# Altium PCB Lab1_PCB.PcbDoc
Units mm, origin at the board's own origin, x right, y up, seen from the top; angles counter-clockwise.
Board outline 45.47 x 24.64 mm, 2 copper layers (Top Layer, Bottom Layer); 16 components, 15 nets, 57 pads, 16 vias.
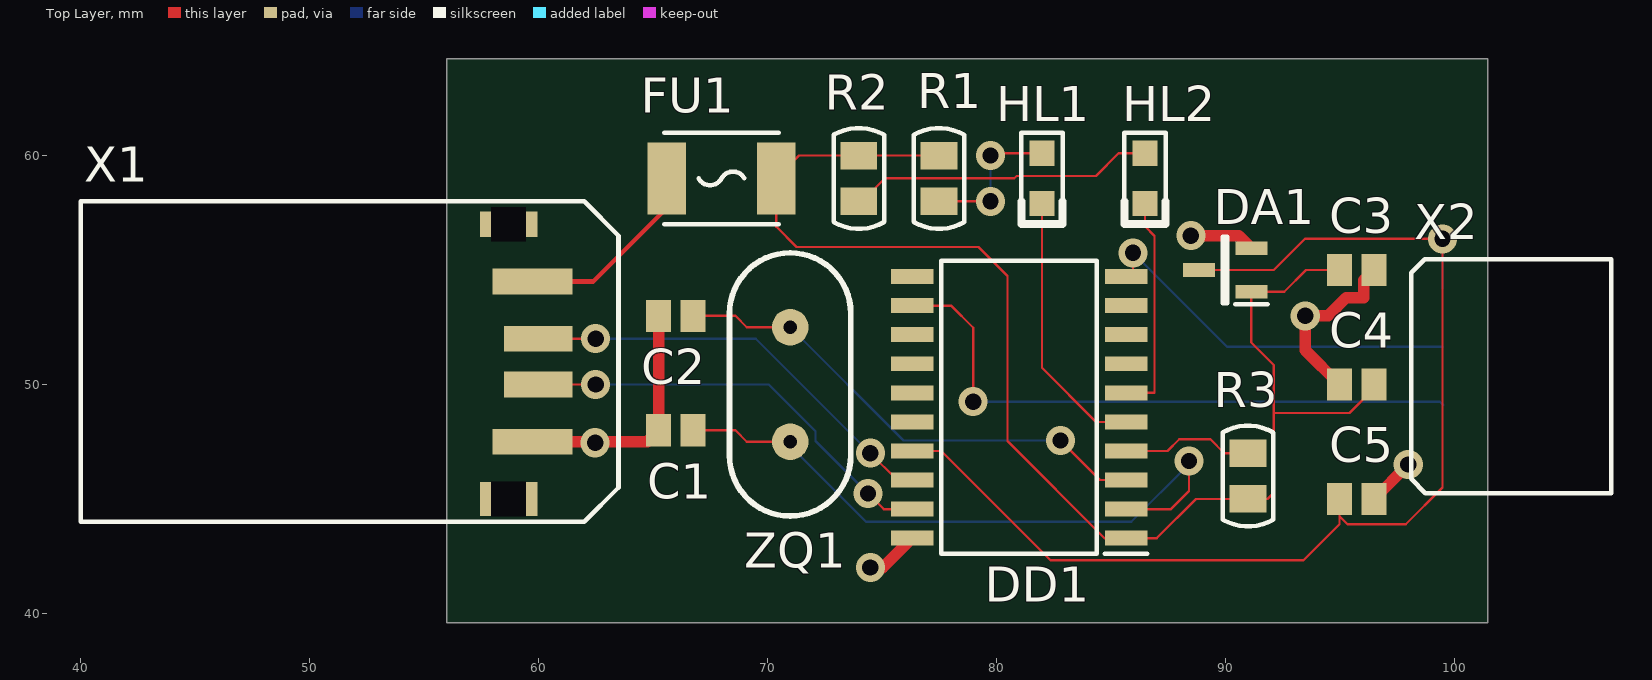
[diagram p0: Top Layer view]
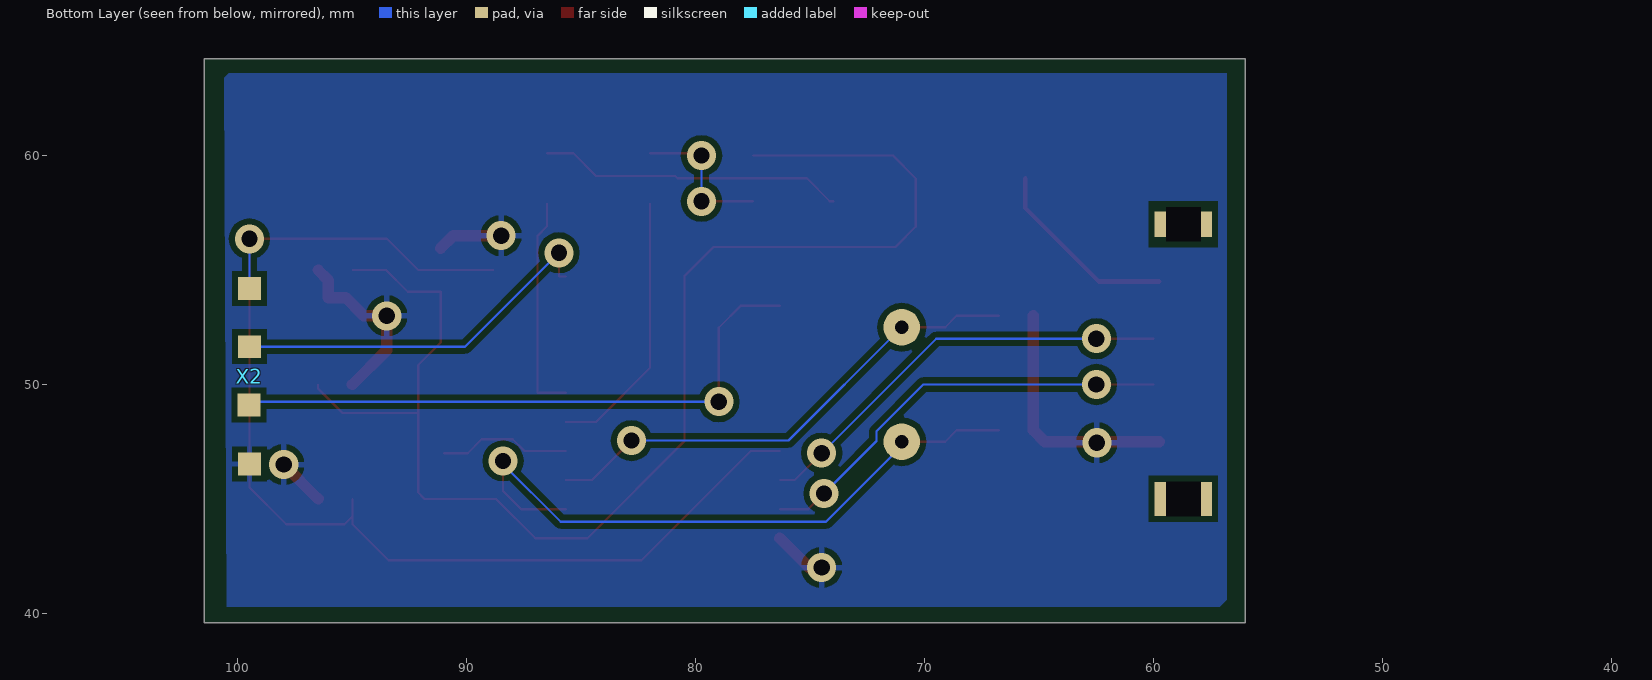
[diagram p1: Bottom Layer view, seen from below]
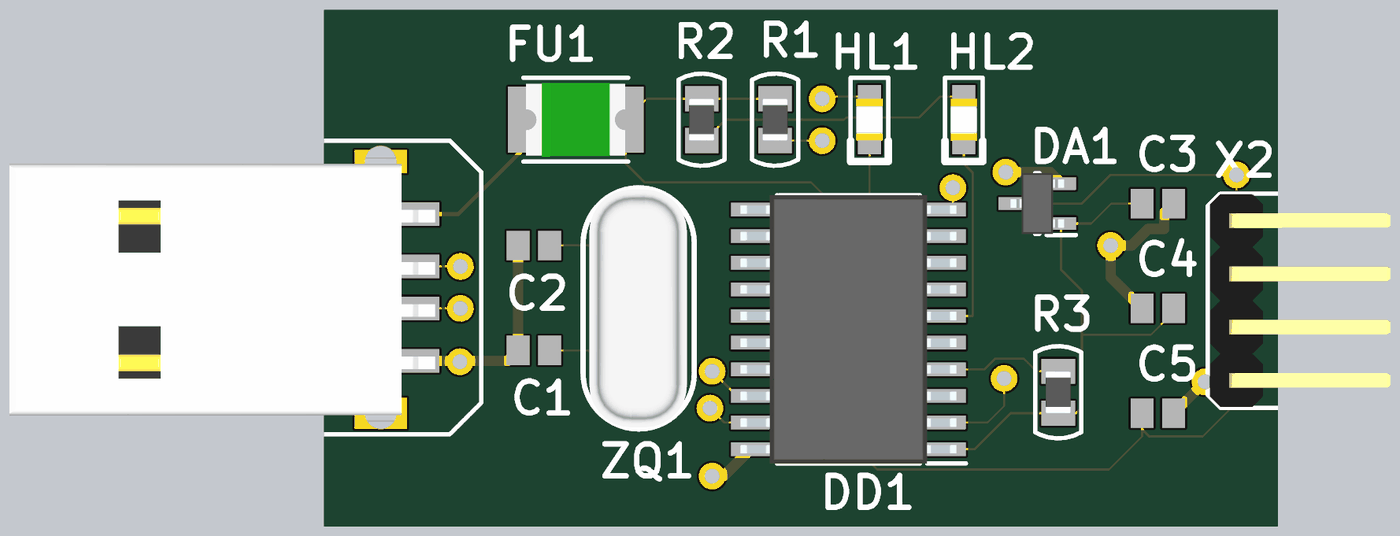
[diagram p2: 3D render of the assembled board from above, using the file's embedded part models]

## Layer stack, top to bottom
Top Solder: solder mask 0.0102, Solder Resist, Dk 3.5
Top Layer: signal copper 0.0356
Dielectric 1: dielectric 0.32, FR-4, Dk 4.8
Bottom Layer: signal copper 0.0356
Bottom Solder: solder mask 0.0102, Solder Resist, Dk 3.5

## Board outline
56,39.599 101.473,39.599 101.473,64.237 56,64.237

## Design rules (kind name [scope] priority, off if disabled: settings)
Clearance Clearance_1 [All] p1: gap=0.254 ignorepadtopadclearanceinfootprint=FALSE except(0: Arc-Hole Track-Hole SMDPad-Hole THPad-Hole Via-Hole Fill-Hole Poly-Hole Region-Hole Text-Hole)
Clearance Clearance__GND_1mm [InNet('GND')] p2: gap=1 ignorepadtopadclearanceinfootprint=FALSE
DiffPairsRouting [All] p1: maxlimit=1 minlimit=0.254 mostfreqgap=0.5 toplayer_minwidth=0.381 toplayer_maxwidth=0.381 toplayer_prefwidth=0.381 bottomlayer_minwidth=0.381 bottomlayer_maxwidth=0.381 bottomlayer_prefwidth=0.381 maxuncoupledlength=12.7
PolygonConnect [All] p1: connectstyle=Relief reliefconductorwidth=0.254 reliefentries=4 polygonreliefangle="90 Angle" airgapwidth=0.254
RoutingCorners [All] p1: cornerstyle=Round minsetback=2.54 maxsetback=2.54
RoutingPriority GND_First [InNet('GND')] p1: routingpriority=0
RoutingVias [All] p1: holewidth=0.711 width=1.27 viastyle="Through Hole" minholewidth=0.711 minwidth=1.27 maxholewidth=0.711 maxwidth=1.27
SolderMaskExpansion [All] p1: expansion=0.102
Width NetFU1_2/Power_0.2mm [InNet('NetFU1_2')] p1: maxlimit=0.2 minlimit=0.2 preferedwidth=0.2
Width "GND_0.5 mm" [InNet('GND')] p2: maxlimit=0.5 minlimit=0.5 preferedwidth=0.5
Width [All] p3: maxlimit=0.1 minlimit=0.1 preferedwidth=0.1
27 further rules are at their usual default settings.

## Components (designator, comment, footprint, x,y, rotation, side; value= is the part's Value field where it differs from the comment)
C1 "Capacitor" C0805 66,48 r0 top value=14
C2 "Capacitor" C0805 66,53 r0 top value=14
C3 "Capacitor" C0805 95.75,55 r0 top value=100
C4 "Capacitor" C0805 95.75,50 r0 top value=470н
C5 "Capacitor" C0805 95.75,45 r0 top value=33мк
DA1 "LM3940" SOT95P255X145-3N 90,55 r180 top
DD1 "MCP2200" SOIC127P1030X265-20N 81,49 r180 top
FU1 "Fuse" F1812 68,59 r180 top value=0.5A
HL1 "Text" LD0805 82,59 r270 top
HL2 "Text" LD0805 86.5,59 r270 top
R1 "Resistor_0,05W" R0805 77.5,59 r90 top
R2 "Resistor_0,05W" R0805 74,59 r90 top
R3 "Resistor_0,05W" R0805 91,46 r270 top value=1К
X1 "USB" USB 60,51 r0 top
X2 "UART" UART 102,51 r0 top
ZQ1 "Crystal" HC-49S 71,50 r90 top

## Footprints (in the part's own frame and the unit in brackets; to place one, negate y for a bottom-side part, rotate by r counter-clockwise, add the part's x,y. Pads: shape width x height; smd on the part's side, far side on the other; paste and mask are expansions set on the pad)
C0805 [mm] "Chip Capacitor, Body 2.0x1.3mm, IPC High Density"
  rect 1.1x1.4 smd: 1(-0.75,0) 2(0.75,0)
  body extent -1.1,-0.72 1.1,0.72, height 1.4
F1812 [mm]
  rect 1.68x3.15 smd: 1(-2.39,0) 2(2.39,0)
  silkscreen extent -2.5,-2 2.5,2, body extent -2.36,-1.74 2.37,1.74, height 1.04
HC-49S [mm] "HC49 Short Through-hole Mount Footprint"
  round 1.6 hole 0.6: 1(-2.5,0) 3(2.5,0)
  silkscreen extent -5.75,-2.65 5.75,2.65, body extent -5.68,-2.3 5.68,2.35, height 5
LD0805 [mm]
  rect 1.1x1.1 smd: 1(-1.1,0) 2(1.1,0)
  silkscreen extent -2,-0.9 2,0.9, body extent -1,-0.62 1,0.63, height 0.73
R0805 [mm] "2012M"
  rect 1.2x1.6 smd: 1(-1,0) 2(1,0)
  silkscreen extent -2.2,-1.1 2.2,1.1, body extent -1,-0.6 1,0.6, height 0.5
SOIC127P1030X265-20N [mm]
  rect 1.85x0.65 smd: 1(-4.675,5.715) 2(-4.675,4.445) 3(-4.675,3.175) 4(-4.675,1.905) 5(-4.675,0.635) 6(-4.675,-0.635) 7(-4.675,-1.905) 8(-4.675,-3.175) 9(-4.675,-4.445) 10(-4.675,-5.715) 11(4.675,-5.715) 12(4.675,-4.445) 13(4.675,-3.175) 14(4.675,-1.905) 15(4.675,-0.635) 16(4.675,0.635) 17(4.675,1.905) 18(4.675,3.175) 19(4.675,4.445) 20(4.675,5.715)
  silkscreen extent -5.6,-6.4 3.4,6.4, body extent -5.15,-6.4 5.15,6.4, height 2.65
SOT95P255X145-3N [mm]
  rect 1.4x0.6 smd: 1(-1.15,0.95) 2(-1.15,-0.95) 3(1.15,0)
  silkscreen extent -1.85,-1.45 0.1,1.5, body extent -1.28,-1.45 1.28,1.45, height 1.45
UART [mm]
  rect 1x1 smd far side: 1(-2.5,3.2) 2(-2.5,0.65) 3(-2.475,-1.9) 4(-2.5,-4.475)
  silkscreen extent -3.87,-5.75 4.88,4.48, body extent -3.78,-5.71 4.84,4.45, height 5.45
USB [mm]
  rect 3.5x1.12 smd: 1(-0.25,3.5) 4(-0.25,-3.5)
  rect 3x1.12 smd: 2(0,1) 3(0,-1)
  silkscreen extent -20,-7 3.5,7, body extent -19,-6.4 1.3,6.2, height 3.2

## Part data
C1 C2 C3 C4 C5: Voltage=50В, Type=Конденсатор
HL1 HL2: library part Led-1, Published=03.12.2013, Publisher="Andrew Danich", Type="Индикатор единичный", Произв. номер=SMLE13EC8TT86, Прямое напряжение=3В, Прямой ток=5мА
  HL1: Цвет=Синий
  HL2: Цвет=Зелёный
DA1: Item ID=LM3940
DD1: Create=Litvinov, WTF=RTX
FU1: Type="Вставка плавкая"
R1 R2: Type=Резистор, Сопротивление=470
R3: Type=Резистор
X1: Create=Litvinov, GND=GND, In=D+, Out=D-, U=+5В
X2: Create=Litvinov, GND=GND, In=TxD, Out=RxD, U=+3,3В
ZQ1: Published=08.03.2013, Publisher="Andrew Danich", Type=Резонатор, Частота=12МГц

## Free pads (board coordinates)
  rect 2.5x1.5 hole 1.5 square: 1(58.7,45)
  rect 2.5x1.1 hole 1.5 square: 1(58.7,57)

## Via types
v1: diameter 1.27, hole 0.711, Top Layer to Bottom Layer, 16 vias

## Nets (pads, with @x,y where several pads share a name; then routed paths per layer and width w, separated by ;. In a path a pad name is that pad's centre, name@x,y a point inside that pad or via, vN(x,y) a via of type N, cw(c..) or ccw(c..) an arc to the next point about the centre after c; other vN are vias at no path point)
GND: C1.1 C2.1 C3.2 C4.1 C5.2 DA1.2 DD1.20 X1.4 X2.4 | length 26
  Top Layer w0.5: X1.4 64.75,47.5 C1.1 65.25,50.495 C2.1 ; v1(74.5,42) 75.04,42 DD1.20 ; v1(88.5,56.5) 90.6,56.5 DA1.2 ; C4.1 93.5,51.5 v1(93.5,53) 94.5,53 95.296,53.796 96.054,53.796 96.054,54.554 C3.2 ; C5.2 v1(98,46.5)
  other v1: 62.48,47.455
NetC1_2: C1.2 DD1.2 ZQ1.1 | length 29
  Top Layer w0.1: C1.2 68.605,48 69.105,47.5 ZQ1.1 ; DD1.2 87.63,44.555 88.417,45.342 v1(88.417,46.66)
  Bottom Layer w0.1: ZQ1.1 71,47.309 74.31,44 85.9,44 88.417,46.517 v1(88.417,46.66)
NetC2_2: C2.2 DD1.3 ZQ1.3 | length 21.9
  Top Layer w0.1: C2.2 68.605,53 69.105,52.5 ZQ1.3 ; v1(82.807,47.549) 84.531,45.825 DD1.3
  Bottom Layer w0.1: ZQ1.3 75.951,47.549 v1(82.807,47.549)
NetC3_1: C3.1 C4.2 DA1.1 DD1.1 FU1.1 R1.2 R2.2 R3.2 | length 60.5
  Top Layer w0.1: R1.2 R2.2 71.39,60 FU1.1 70.39,56.896 71.279,56.007 79.223,56.007 80.493,54.737 80.493,47.527 84.734,43.285 DD1.1 87.007,43.285 88.722,45 R3.2 91.846,45 92.126,45.279 92.126,48.75 ; C3.1 93.533,55 92.583,54.05 DA1.1 91.135,54.05 91.135,51.841 92.126,50.851 92.126,48.75 ; C4.2 96.5,49.82 95.43,48.75 92.126,48.75
NetC5_1: C5.1 DA1.3 DD1.17 X2.1 | length 52
  Top Layer w0.1: DD1.17 77.594,47.095 82.372,42.316 93.425,42.316 95,43.891 95,44.243 ; DA1.3 92.126,55 93.488,56.363 v1(99.5,56.363) 99.5,45.5 97.891,43.891 95.352,43.891 95,44.243 ; C5.1 95,44.243
  Bottom Layer w0.1: X2.1 v1(99.5,56.363)
NetDD1_4: DD1.4 R3.1 | length 5.8
  Top Layer w0.1: DD1.4 87.481,47.095 87.992,47.605 89.359,47.605 89.965,47 R3.1
NetDD1_5: DD1.5 HL1.2 | length 11.8
  Top Layer w0.1: HL1.2 82,50.726 84.361,48.365 DD1.5
NetDD1_6: DD1.6 HL2.2 | length 9.7
  Top Layer w0.1: DD1.6 86.919,49.635 86.919,56.49 86.5,56.908 HL2.2
NetDD1_10: DD1.10 X2.2 | length 16.6
  Top Layer w0.1: DD1.10 85.979,54.715 v1(85.979,55.753)
  Bottom Layer w0.1: v1(85.979,55.753) 90.082,51.65 X2.2
NetDD1_12: DD1.12 X2.3 | length 26.9
  Top Layer w0.1: DD1.12 78.029,53.445 78.994,52.48 v1(78.994,49.248)
  Bottom Layer w0.1: v1(78.994,49.248) 99.377,49.248 X2.3
NetDD1_18: DD1.18 X1.2 | length 18.9
  Top Layer w0.1: X1.2 v1(62.5,52) ; v1(74.5,47) 75.675,45.825 DD1.18
  Bottom Layer w0.1: v1(62.5,52) 69.5,52 v1(74.5,47)
NetDD1_19: DD1.19 X1.3 | length 18.8
  Top Layer w0.1: X1.3 v1(62.5,50) ; v1(74.397,45.241) 75.082,44.555 DD1.19
  Bottom Layer w0.1: v1(62.5,50) 70.061,50 72.104,47.957 72.104,47.533 v1(74.397,45.241)
NetFU1_2: FU1.2 X1.1 | length 8.5
  Top Layer w0.2: X1.1 62.401,54.5 65.61,57.709 FU1.2
NetHL1_1: HL1.1 R1.1 | length 6.5
  Top Layer w0.1: R1.1 v1(79.75,58) ; v1(79.75,60) 79.85,60.1 HL1.1
  Bottom Layer w0.1: v1(79.75,58) v1(79.75,60)
NetHL2_1: HL2.1 R2.1 | length 13.4
  Top Layer w0.1: R2.1 74.143,58 75.147,59.004 80.792,59.004 80.896,59.108 84.356,59.108 85.348,60.1 HL2.1
pads on no net: DD1.7 DD1.8 DD1.9 DD1.11 DD1.13 DD1.14 DD1.15 DD1.16

## Polygon pours and split planes (outlines as drawn)
GND on Bottom Layer "Bottom Layer-No Net" (solid, pour order 6): 100.6,63.4 100.4,63.6 56.8,63.6 56.8,40.6 57.1,40.3 100.5,40.3

## Silkscreen, mask and mechanical layers (free items; w line width, h text height)
Mechanical 19:
  the board outline again, w0.254